# EAGLE board weather station - simple - mirror (EAGLE 9.0.1)
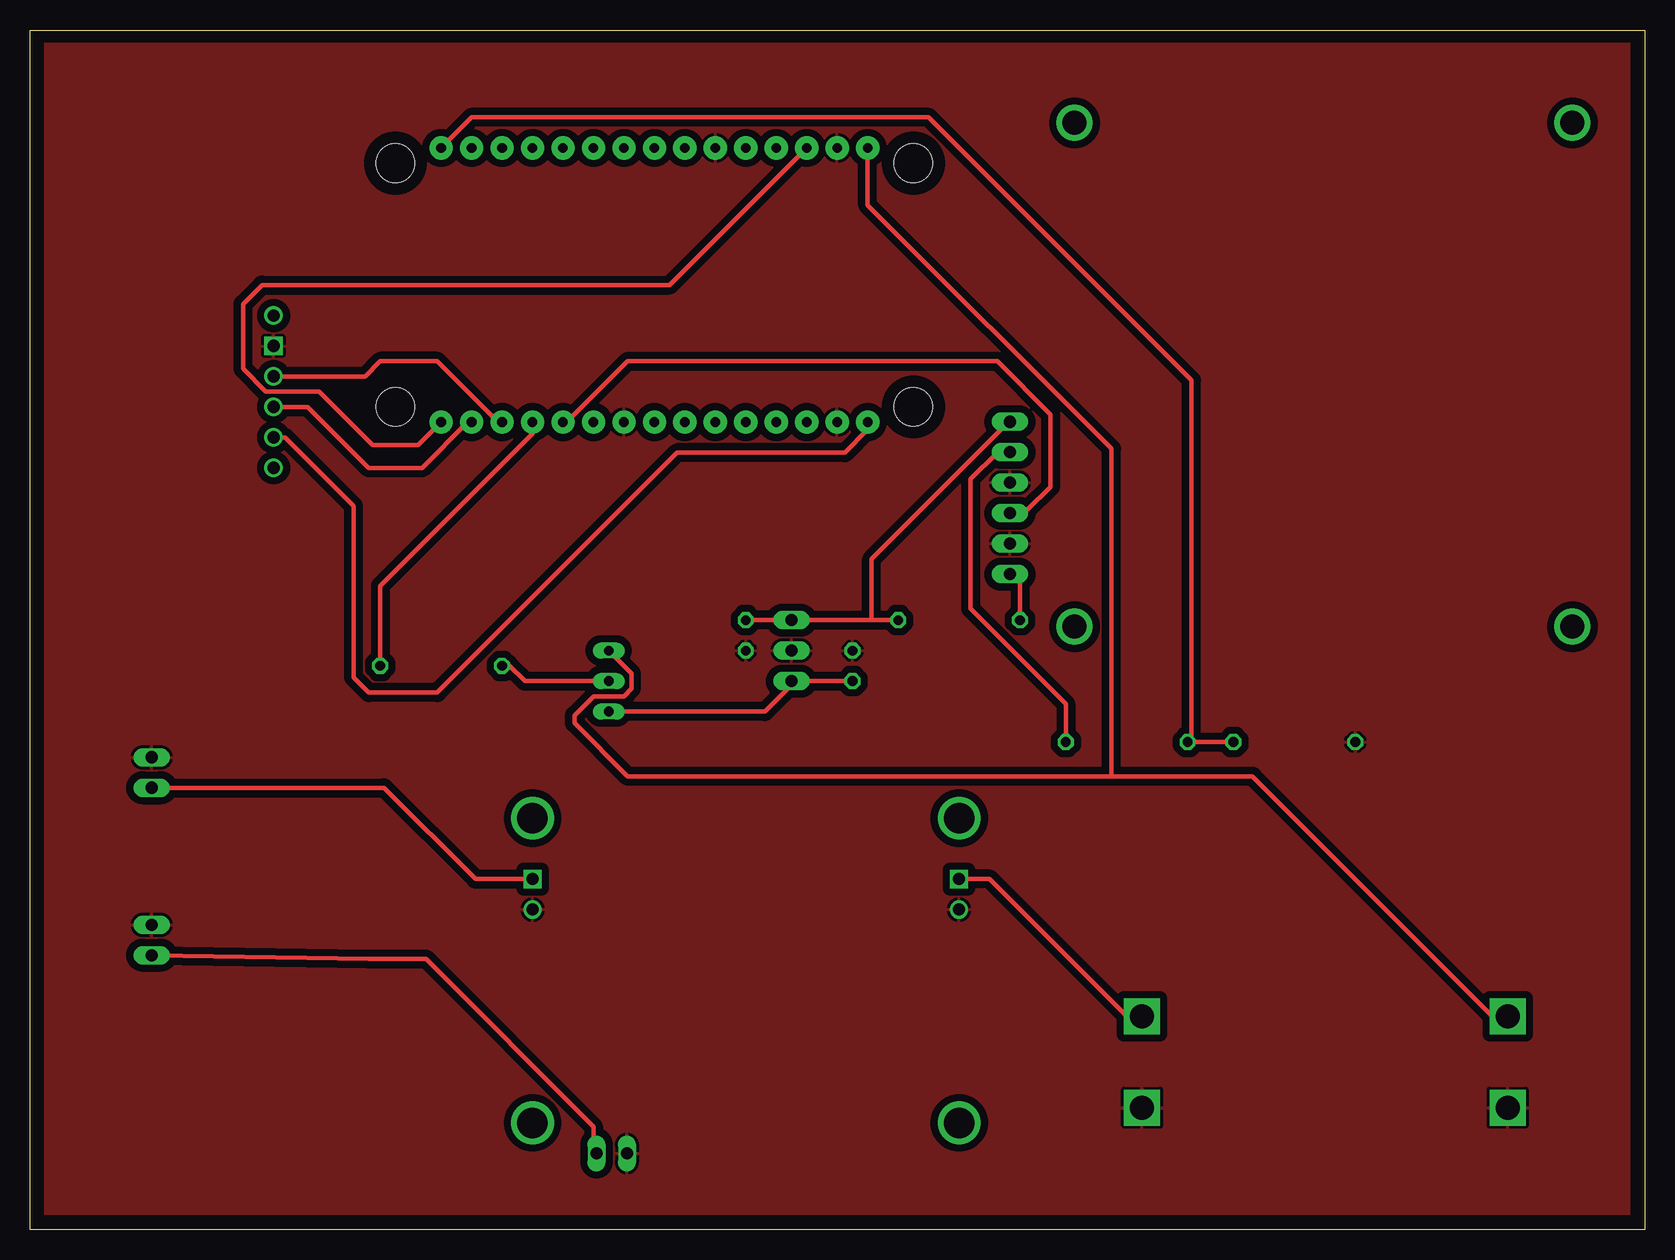
[diagram p0: board, top side]
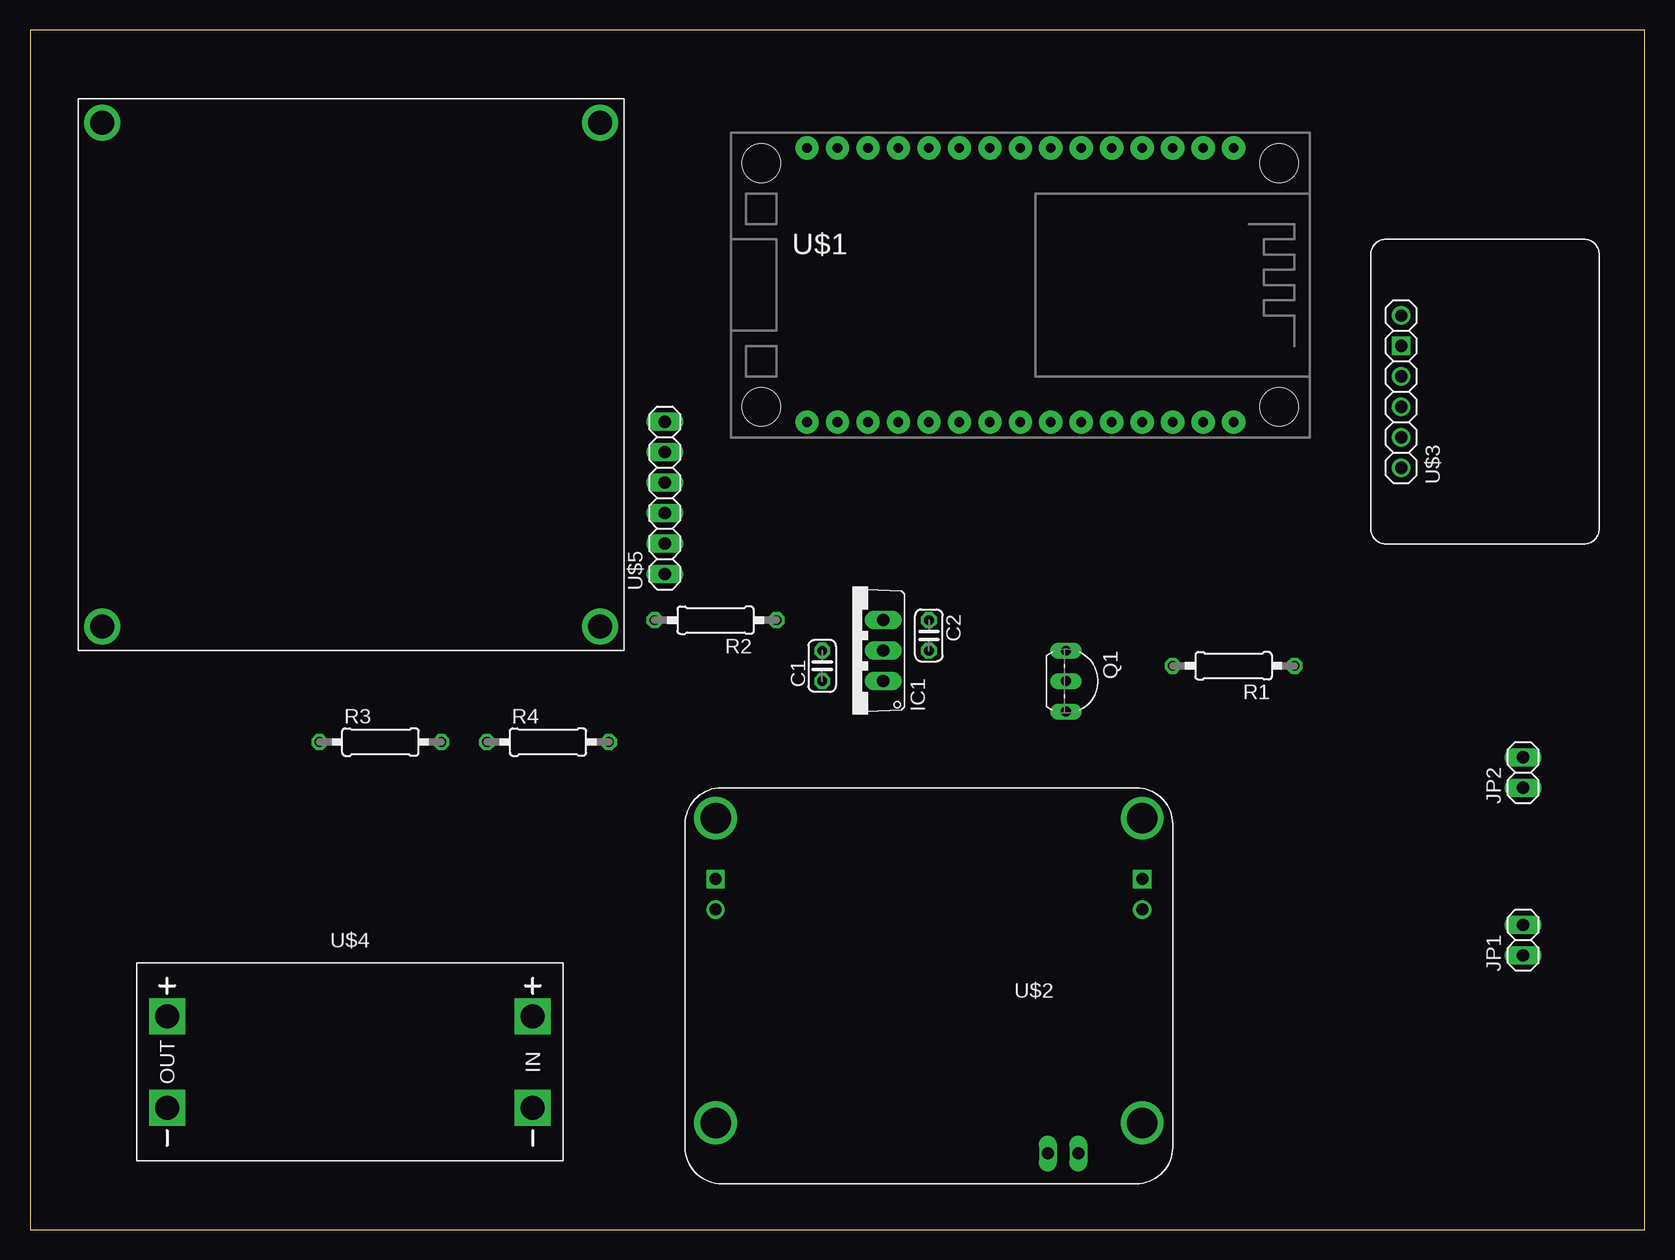
[diagram p1: board, bottom side, seen from below]

Size 134.6 x 100 mm. Coordinates in mm from the lower left corner, seen from the top.
Outline: 134.6,0 0,0 0,100 134.6,100 134.6,0
Copper layers (1*16): Top 0.035mm / dielectric 1.5mm / Bottom 0.035mm
Design rules "default *": minimum track width 15mil, minimum drill 0.35mm, track to track 10mil, track to pad 10mil, pad to pad 6mil, via to via 6mil, smd to smd 6mil, copper to edge 40mil, drill to drill 6mil, minimum pad ring 10mil, minimum via ring 8mil, stop-mask expansion 4mil, vias tented up to drill 0mil, thermal gap 10mil

## Footprints (pad centres in the part's own frame; a part is rotated, then mirrored left to right if it is on the bottom)
C025-024X044 = drill 0.813 octagon: 1 -1.27,0; 2 1.27,0
TO220V = drill 1.016 long: 1 -2.54,-2.54; 2 0,-2.54; 3 2.54,-2.54
1X02 = drill 1.016 long: 1 -1.27,0; 2 1.27,0
TO92-EBC = drill 0.813 long: B 0,-1.27; C -2.54,-1.27; E 2.54,-1.27
0207/10 = drill 0.813 octagon: 1 -5.08,0; 2 5.08,0
ESP12E_DEVKIT = drill 0.8 pad 1.93: 3V3@0 -11.43,-7.62; 3V3@1 11.43,5.08; 3V3@2 11.43,-17.78; AD0 -11.43,17.78; CLK -11.43,-2.54; CMD -11.43,2.54; D0 11.43,17.78; D1 11.43,15.24; D2 11.43,12.7; D3 11.43,10.16; D4 11.43,7.62; D5 11.43,0; D6 11.43,-2.54; D7 11.43,-5.08; D8 11.43,-7.62; EN -11.43,-10.16; GND@0 -11.43,-5.08; GND@1 -11.43,-15.24; GND@2 11.43,2.54; GND@3 11.43,-15.24; RST -11.43,-12.7; RSV@0 -11.43,15.24; RSV@1 -11.43,12.7; RX 11.43,-10.16; SD0 -11.43,0; SD1 -11.43,5.08; SD2 -11.43,7.62; SD3 -11.43,10.16; TX 11.43,-12.7; VIN -11.43,-17.78 | hole 3.2: -10.16,21.59; 10.16,21.59; 10.16,-21.59; -10.16,-21.59
ADAFRUIT_SOLARCHARGER = drill 1 square: BATT 2.54,7.62; LOAD 38.1,7.62 | drill 1: GND1 2.54,10.16; GND2 38.1,10.16 | drill 1 long: GND3 10.414,30.48; VCC 7.874,30.48 | drill 2.54: P$1 2.54,2.54; P$2 2.54,27.94; P$3 38.1,2.54; P$4 38.1,27.94
1X06 = drill 1.016: CS -6.35,0; SCK 1.27,0; SDI -1.27,0; SDO 6.35,0; VCC -3.81,0 | drill 1.016 square: GND 3.81,0
DC-DC-STEP-UP-MT3608 = drill 2 pad 2.8 square: IN+ 15.24,3.81; IN- 15.24,-3.81; OUT+ -15.24,3.81; OUT- -15.24,-3.81
DUST_SENSOR = drill 1.016 long: 1 6.38,-3.38; 2 8.92,-3.38; 3 11.46,-3.38; 4 14,-3.38; 5 16.54,-3.38; 6 19.08,-3.38 | drill 2: P$1 2,2; P$2 2,43.5; P$3 44,43.5; P$4 44,2

## Placement (x,y rotation side)
C1  [C025-024X044]  68.56,46.99 90 bottom
C2  [C025-024X044]  59.67,49.53 270 bottom
IC1  7805TV  [TO220V]  66.02,48.26 90 bottom
JP1  [1X02]  10.14,24.13 90 bottom
JP2  [1X02]  10.14,38.1 90 bottom
Q1  BC546B  [TO92-EBC]  46.97,45.72 270 bottom
R1  [0207/10]  34.27,46.99 180 bottom
R2  [0207/10]  77.45,50.8 180 bottom
R3  [0207/10]  105.39,40.64 0 bottom
R4  [0207/10]  91.42,40.64 0 bottom
U$1  ESP12E_DEVKIT  [ESP12E_DEVKIT]  52.05,78.74 270 bottom
U$2  ADAFRUIT_SOLARCHARGER  [ADAFRUIT_SOLARCHARGER]  39.35,36.83 180 bottom
U$3  BME680_BLUEDOT  [1X06]  20.3,69.85 90 bottom
U$4  DC-DC-STEP-UP-MT3608  [DC-DC-STEP-UP-MT3608]  107.93,13.97 0 bottom
U$5  DUST_SENSOR  [DUST_SENSOR]  85.07,48.26 90 bottom

## Library data of the parts
C1 C2 = rcl; SPICEPREFIX: C
IC1 = linear
JP1 JP2 = pinhead
Q1 = transistor-npn
R1-R4 = rcl; SPICEPREFIX: R
U$1 = ESP12E_DEVKIT
U$2 = ADAFRUIT-SOLARCHARGER
U$3 = bme-680
U$4 = diy-modules
U$5 = dust-sensor

## Nets
+3V3: U$1.3V3@2 U$3.VCC
+5V: C2.1 IC1.3 R2.1 U$5.6
+10V: Q1.C U$1.VIN U$4.OUT+
AOUT: R4.2 U$5.5
DS_POWER: R1.1 U$1.D3
GND: C1.2 C2.2 IC1.2 JP1.2 JP2.2 R3.1 U$1.GND@0 U$1.GND@1 U$1.GND@2 U$1.GND@3 U$2.GND1 U$2.GND2 U$2.GND3 U$3.GND U$4.IN- U$4.OUT- U$5.2 U$5.4
ILED: U$1.D4 U$5.3
N$1: U$3.CS
N$2: JP2.1 U$2.BATT
N$3: JP1.1 U$2.VCC
N$4: C1.1 IC1.1 Q1.E
N$5: Q1.B R1.2
N$6: R2.2 U$5.1
N$7: U$3.SDO
N$8: R3.2 R4.1 U$1.AD0
RESET: U$1.D0 U$1.RST
SCK: U$1.D2 U$3.SCK
SDI: U$1.D1 U$3.SDI
VCC: U$2.LOAD U$4.IN+

## Tracks (layer width: path | path; a pad name or v marks a point on that pad's centre or on a via)
+3V3
  Top 0.381: U$3.VCC 21.25,66.04 26.97,60.33 26.97,46.04 28.24,44.77 33.95,44.77 53.95,64.77 67.92,64.77 69.83,66.67 U$1.3V3@2
+5V
  Top 0.381: 70.15,50.8 IC1.3 C2.1 | 70.15,50.8 R2.1 | 70.15,50.8 70.15,55.88 81.58,67.31 U$5.6
+10V
  Top 0.381: Q1.C 50.14,46.35 50.14,45.09 49.51,44.45 46.97,44.45 45.38,42.86 45.38,42.23 49.83,37.78 90.15,37.78 | 90.15,37.78 101.9,37.78 121.9,17.78 U$4.OUT+ | U$1.VIN 69.83,85.41 90.15,65.09 90.15,37.78
AOUT
  Top 0.381: R4.2 86.34,43.81 78.4,51.75 78.4,62.55 80.62,64.77 81.58,64.77 U$5.5
DS_POWER
  Top 0.381: R1.1 29.19,53.66 41.89,66.36 U$1.D3
GND
  pour Top (isolate 0.61): 133.33,1.27 1.25,1.27 1.25,99.06 133.33,99.06
ILED
  Top 0.381: U$1.D4 44.75,67.31 49.83,72.39 80.62,72.39 85.07,67.94 85.07,61.91 83.17,60.01 81.9,60.01 U$5.3
N$2
  Top 0.381: U$2.BATT 37.13,29.21 29.51,36.83 JP2.1
N$3
  Top 0.381: JP1.1 28.24,22.54 33,22.54 46.97,8.57 46.97,6.35 U$2.VCC
N$4
  Top 0.381: 63.8,45.72 C1.1 | Q1.E 61.26,43.18 63.8,45.72 | 63.8,45.72 IC1.1
N$5
  Top 0.381: Q1.B 41.25,45.72 39.98,46.99 R1.2
N$6
  Top 0.381: R2.2 82.53,53.98 81.9,54.61 U$5.1
N$8
  Top 0.381: 96.82,40.64 R3.2 | U$1.AD0 36.81,92.71 74.91,92.71 96.82,70.8 96.82,40.64 | 96.82,40.64 R4.1
RESET
  Top 0.381: U$1.RST 53.32,78.74 19.35,78.74 17.76,77.15 17.76,71.75 19.66,69.85 24.11,69.85 28.55,65.41 32.36,65.41 U$1.D0
SCK
  Top 0.381: U$3.SCK 27.92,71.12 29.19,72.39 33.95,72.39 39.03,67.31 U$1.D2
SDI
  Top 0.381: U$3.SDI 23.16,68.58 28.24,63.5 32.68,63.5 36.49,67.31 U$1.D1
VCC
  Top 0.381: U$2.LOAD 79.99,29.21 91.42,17.78 U$4.IN+